# EAGLE board temp_control (EAGLE 6.1)
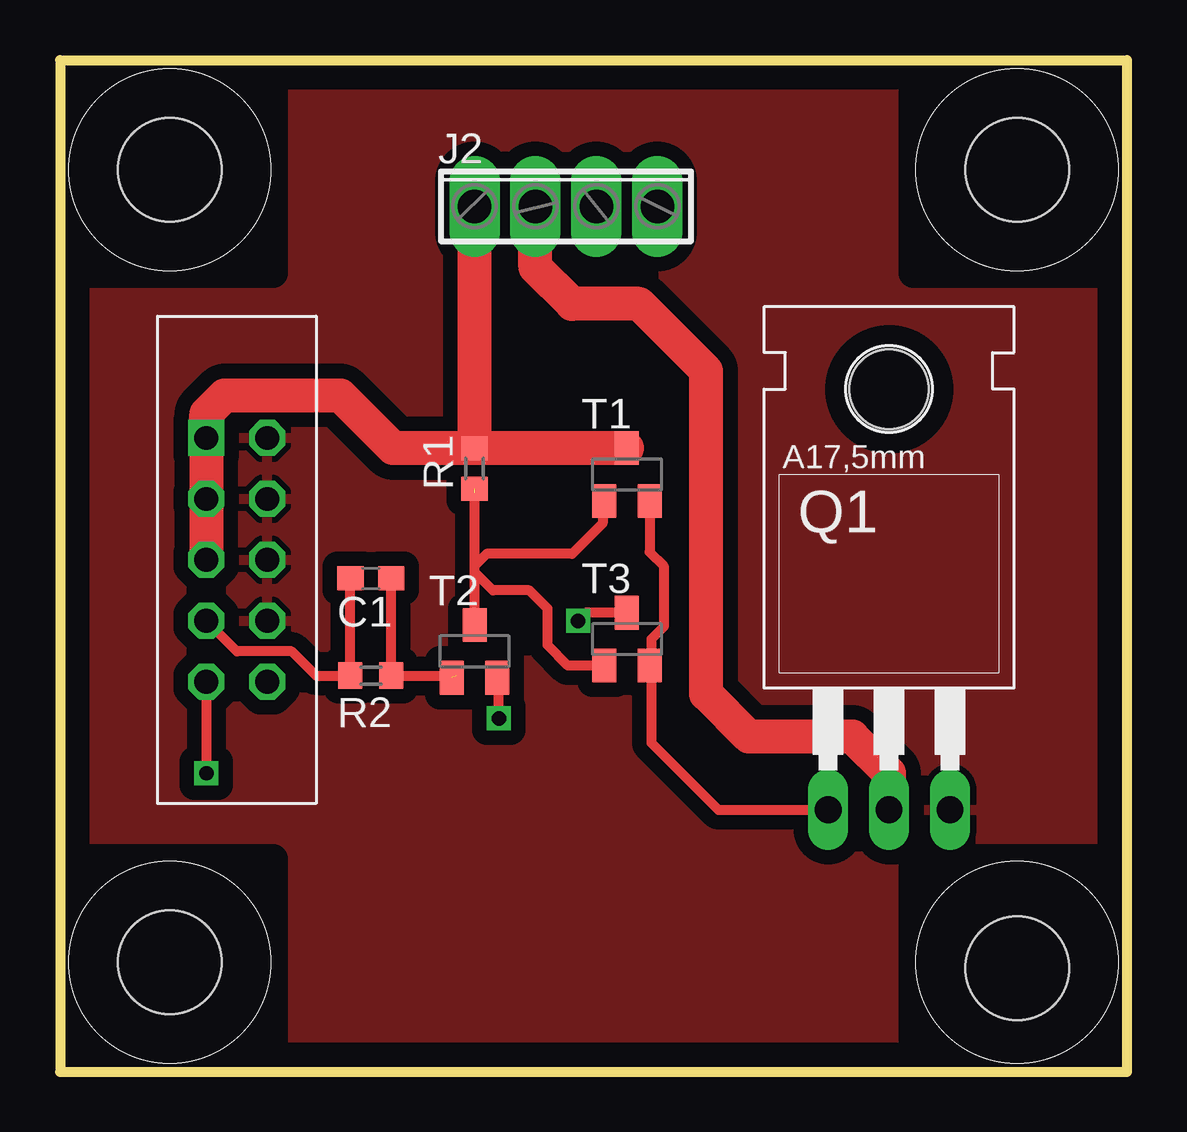
[diagram p0: board, top side]
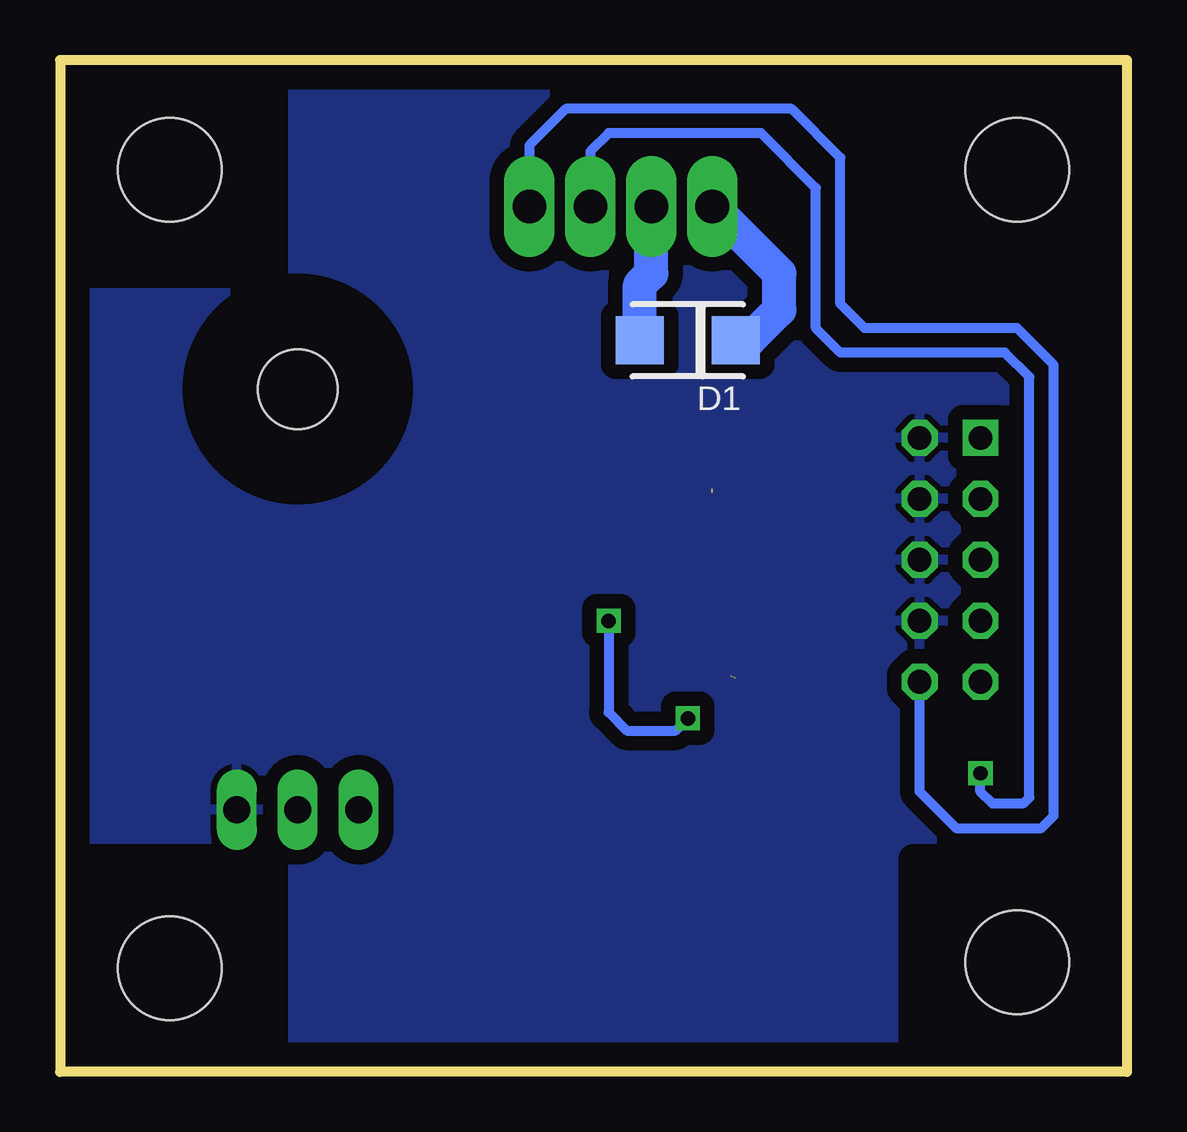
[diagram p1: board, bottom side, seen from below]

Size 44.45 x 42.16 mm. Coordinates in mm from the lower left corner, seen from the top.
Outline: 0,42.16 44.45,42.16 44.45,0 0,0 0,42.16
Copper layers (1*16): Top 0.035mm / dielectric 1.5mm / Bottom 0.035mm
Design rules: minimum track width 10mil, minimum drill 24mil, track to track 10mil, track to pad 10mil, pad to pad 10mil, via to via 10mil, smd to smd 10mil, copper to edge 40mil, drill to drill 8mil, minimum pad ring 10mil, minimum via ring 8mil, stop-mask expansion 4mil, vias tented up to drill 0mil, thermal gap 10mil
Holes 4.32 mm at 4.57,37.59 4.57,4.57 39.88,4.32 39.88,37.59
tRestrict: area 0.3,33.3 to 8.9,41.9; area 0.3,0.3 to 8.9,8.9; area 35.6,0.3 to 44.2,8.9; area 35.6,33.3 to 44.2,41.9
bRestrict: area 0.3,33.3 to 8.9,41.9; area 35.6,33.3 to 44.2,41.9; area 0.3,0.3 to 8.9,8.9; area 35.6,0.3 to 44.2,8.9

## Footprints (pad centres in the part's own frame; a part is rotated, then mirrored left to right if it is on the bottom)
C0603 = smd 1.1 x 1: 1 -0.85,0; 2 0.85,0
DISCRETE_SMA = smd 2 x 2: A 2,0; C -2,0
SBH11-PBPC-D05-ST-BK = drill 0.991 square: 1 0,0 | drill 0.991 octagon: 2 2.54,0; 3 0,-2.54; 4 2.54,-2.54; 5 0,-5.08; 6 2.54,-5.08; 7 0,-7.62; 8 2.54,-7.62; 9 0,-10.16; 10 2.54,-10.16
4POL254 = drill 1.4 long: 1 -3.81,0; 2 -1.27,0; 3 1.27,0; 4 3.81,0
TO220 = drill 1.118 long: 1 -2.54,-6.35; 2 0,-6.35; 3 2.54,-6.35 | hole 3.302: 0,11.176
R0603 = smd 1 x 1.1: 1 -0.85,0; 2 0.85,0
SOT23-BEC = smd 1 x 1.4: B -0.95,-1.1; C 0,1.1; E 0.95,-1.1

## Placement (x,y rotation side)
C1  0.1uF  [C0603]  12.95,20.57 180 top
D1  B340A-13-F  [DISCRETE_SMA]  18.29,30.48 180 bottom
J1  SBH11-PBPC-D05-ST-BK  [SBH11-PBPC-D05-ST-BK]  6.1,26.42 0 top
J2  OSTVN04A150  [4POL254]  21.08,36.07 0 top
Q1  IRL640A  [TO220]  34.54,17.27 0 top
R1  8.2k  [R0603]  17.27,25.15 90 top
R2  4.7k  [R0603]  12.95,16.51 180 top
T1  MMBT2222A  [SOT23-BEC]  23.62,24.89 0 top
T2  MMBT2222A  [SOT23-BEC]  17.27,17.53 0 top
T3  MMBT3906LT1  [SOT23-BEC]  23.62,18.03 0 top

## Library data of the parts
C1 R1 R2 = resistor
D1 = chipKIT_Max32
J1 = SBH11-PBPC-D05-ST-BK
J2 = con-OST-254
Q1 = transistor-fet
T1-T3 = transistor

## Nets
CTRL: C1.2 J1.7 R2.2
GND: J1.2 J1.4 J1.6 J1.8 Q1.3
HEAT0: D1.A J2.2 Q1.2
N$3: C1.1 R2.1 T2.B
N$4: R1.1 T1.B T2.C T3.B
N$6: Q1.1 T1.E T3.E
N$8: T2.E T3.C
THERM1: J1.9 J2.3
THERM2: J1.10 J2.4
VCC: D1.C J1.1 J1.3 J1.5 J2.1 R1.2 T1.C

## Tracks (layer width: path | path; a pad name or v marks a point on that pad's centre or on a via)
CTRL
  Top 0.406: C1.2 11.94,20.41 11.94,20.32 12.1,20.15 R2.2 10.67,16.51 9.65,17.53 7.37,17.53 J1.7
GND
  pour Top (isolate 0.61): 0.51,41.66 43.94,41.66 43.94,0.51 0.25,0.25 0.25,41.15
  pour Bottom (isolate 0.61): 0.51,41.66 43.94,41.66 43.94,0.51 0.51,0.51
HEAT0
  Top 1.422: Q1.2 34.54,12.45 33.02,13.97 28.7,13.97 26.92,15.75 26.92,29.21 24.13,32 21.34,32 19.81,33.53 J2.2
  Bottom 1.422: D1.A 20.29,32.8 19.81,33.27 J2.2
N$3  (1 unrouted)
  Top 0.406: C1.1 R2.1 16.51,16.51
N$4  (1 unrouted)
  Top 0.406: T2.C 17.27,20.83 | 17.27,20.83 17.27,21.08 | 17.27,21.08 17.27,24.13 | T1.B 22.67,23.69 22.61,23.62 22.61,22.86 21.34,21.59 17.78,21.59 17.27,21.08 | T3.B 21.17,16.93 20.32,17.78 20.32,19.3 19.56,20.07 18.03,20.07 17.27,20.83
N$6
  Top 0.406: T1.E 24.57,21.66 25.15,21.08 25.15,18.54 24.64,18.03 24.64,17 | 24.64,17 T3.E | 24.64,17 24.64,13.72 27.43,10.92 Q1.1
N$8  (via drill 0.6)
  Top 0.406: T3.C 21.93,19.13 v21.59,18.8 | v18.29,14.73 18.29,16.36 T2.E
  Bottom 0.406: v21.59,18.8 21.59,14.99 20.83,14.22 18.8,14.22 v18.29,14.73
THERM1  (via drill 0.6)
  Top 0.406: J1.9 v6.1,12.45
  Bottom 0.406: J2.3 22.35,38.35 21.59,39.12 15.24,39.12 12.95,36.83 12.95,30.99 11.94,29.97 5.08,29.97 4.06,28.96 4.06,11.43 4.32,11.18 5.59,11.18 6.1,11.68 v6.1,12.45
THERM2
  Bottom 0.406: J2.4 24.89,38.61 23.37,40.13 13.97,40.13 11.94,38.1 11.94,32 10.92,30.99 4.57,30.99 3.05,29.46 3.05,10.67 3.56,10.16 7.11,10.16 8.64,11.68 J1.10
VCC
  Top 1.422: R1.2 J2.1 | R1.2 13.88,26 11.68,28.19 6.86,28.19 6.1,27.43 J1.1 J1.3 J1.5 | T1.C R1.2
  Bottom 1.422: D1.C 15.75,30.48 14.48,31.75 14.48,33.27 J2.1